# Altium PCB MiniRobot.PcbDoc
Units mm, origin at the board's own origin, x right, y up, seen from the top; angles counter-clockwise.
Board outline 90 x 85 mm, 2 copper layers (Top Layer, Bottom Layer); 52 components, 47 nets, 193 pads, 58 vias.
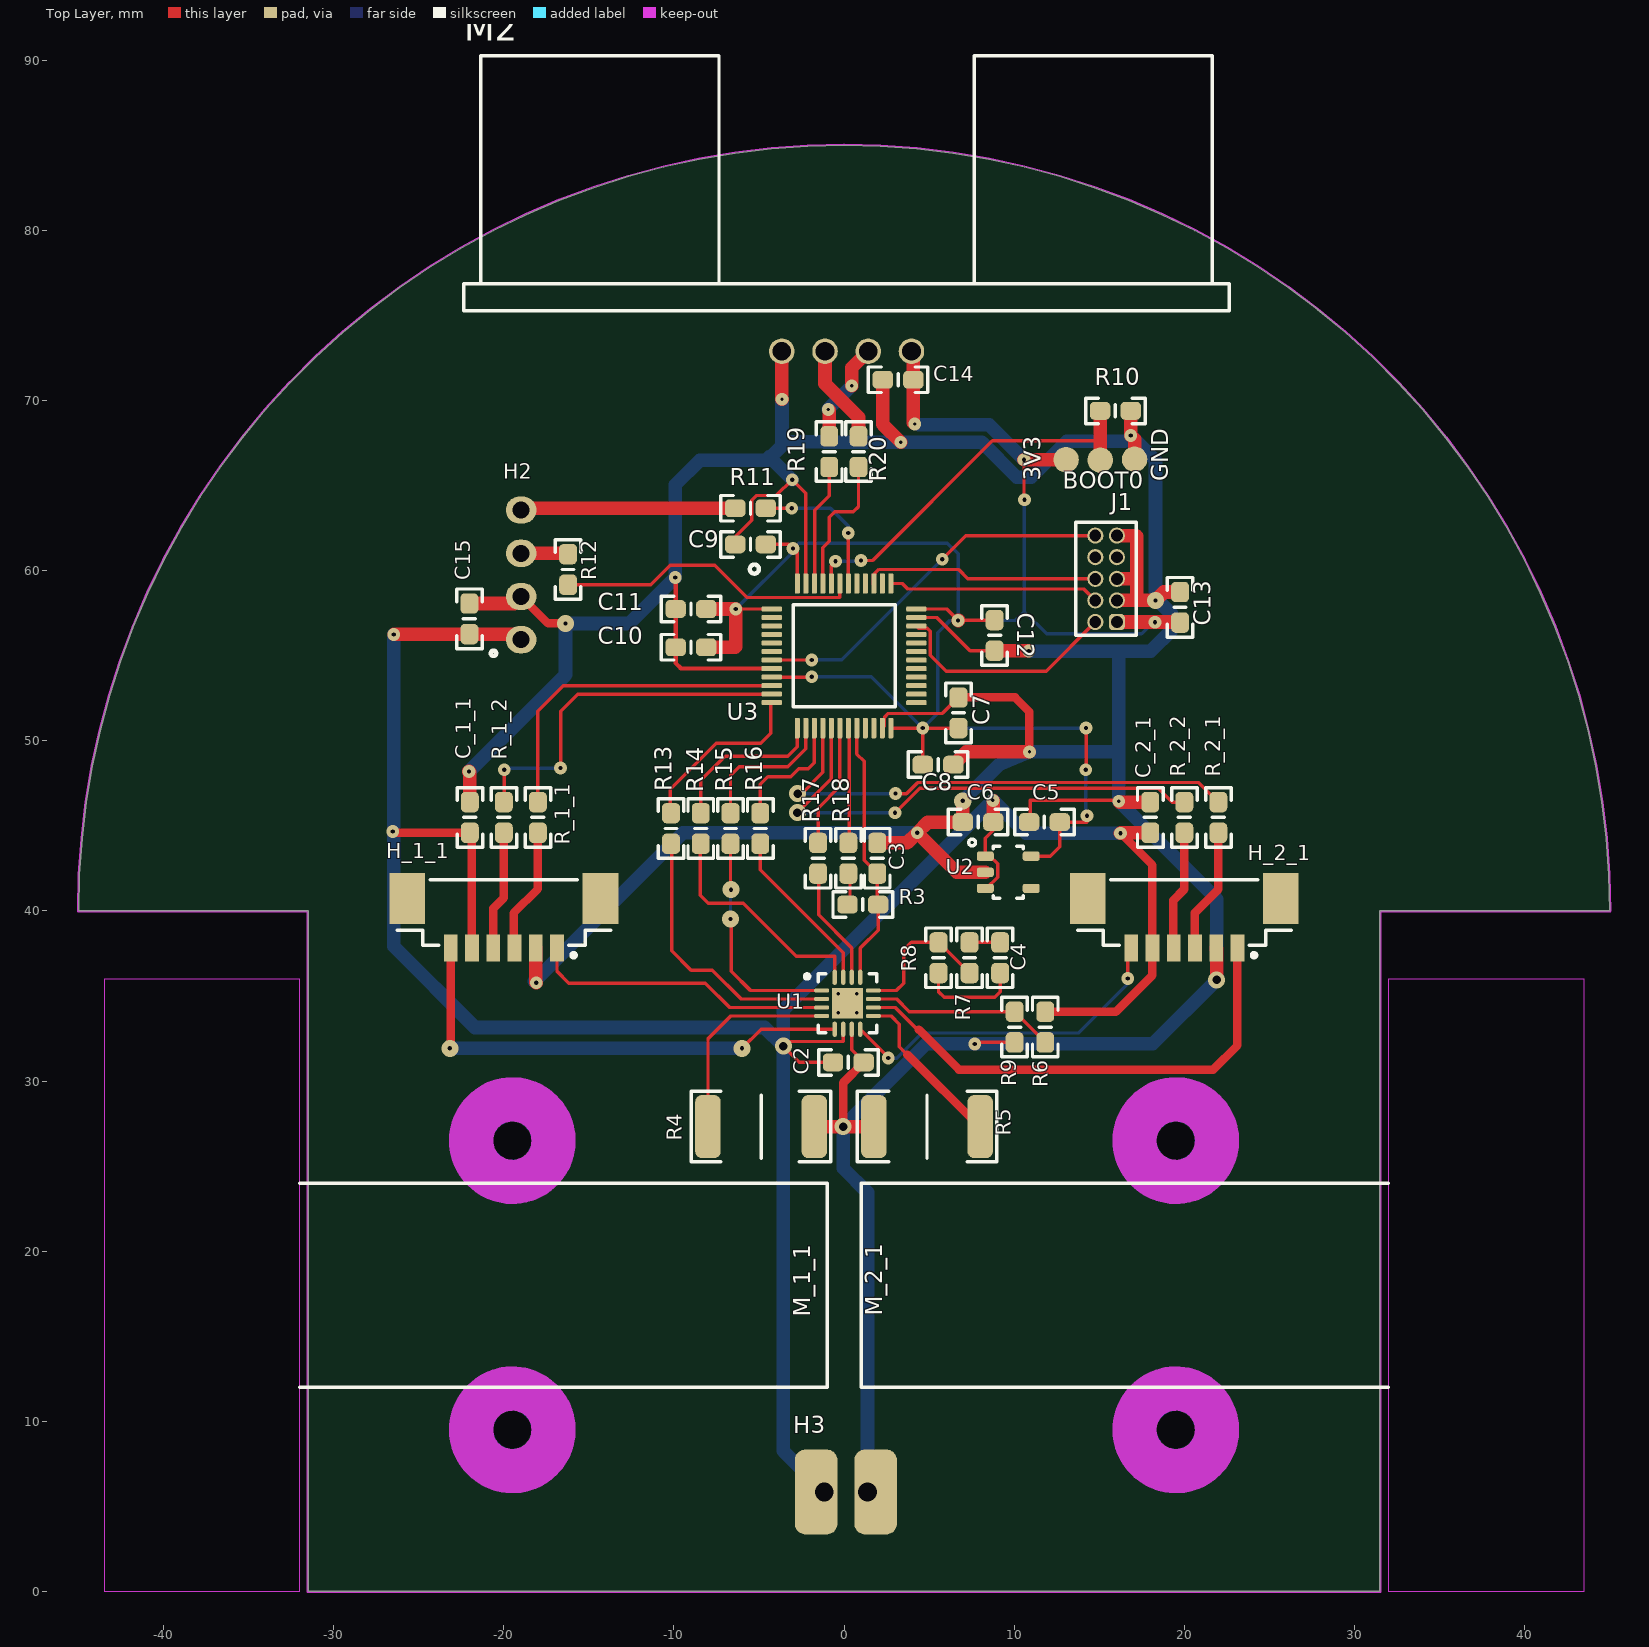
[diagram p0: Top Layer view]
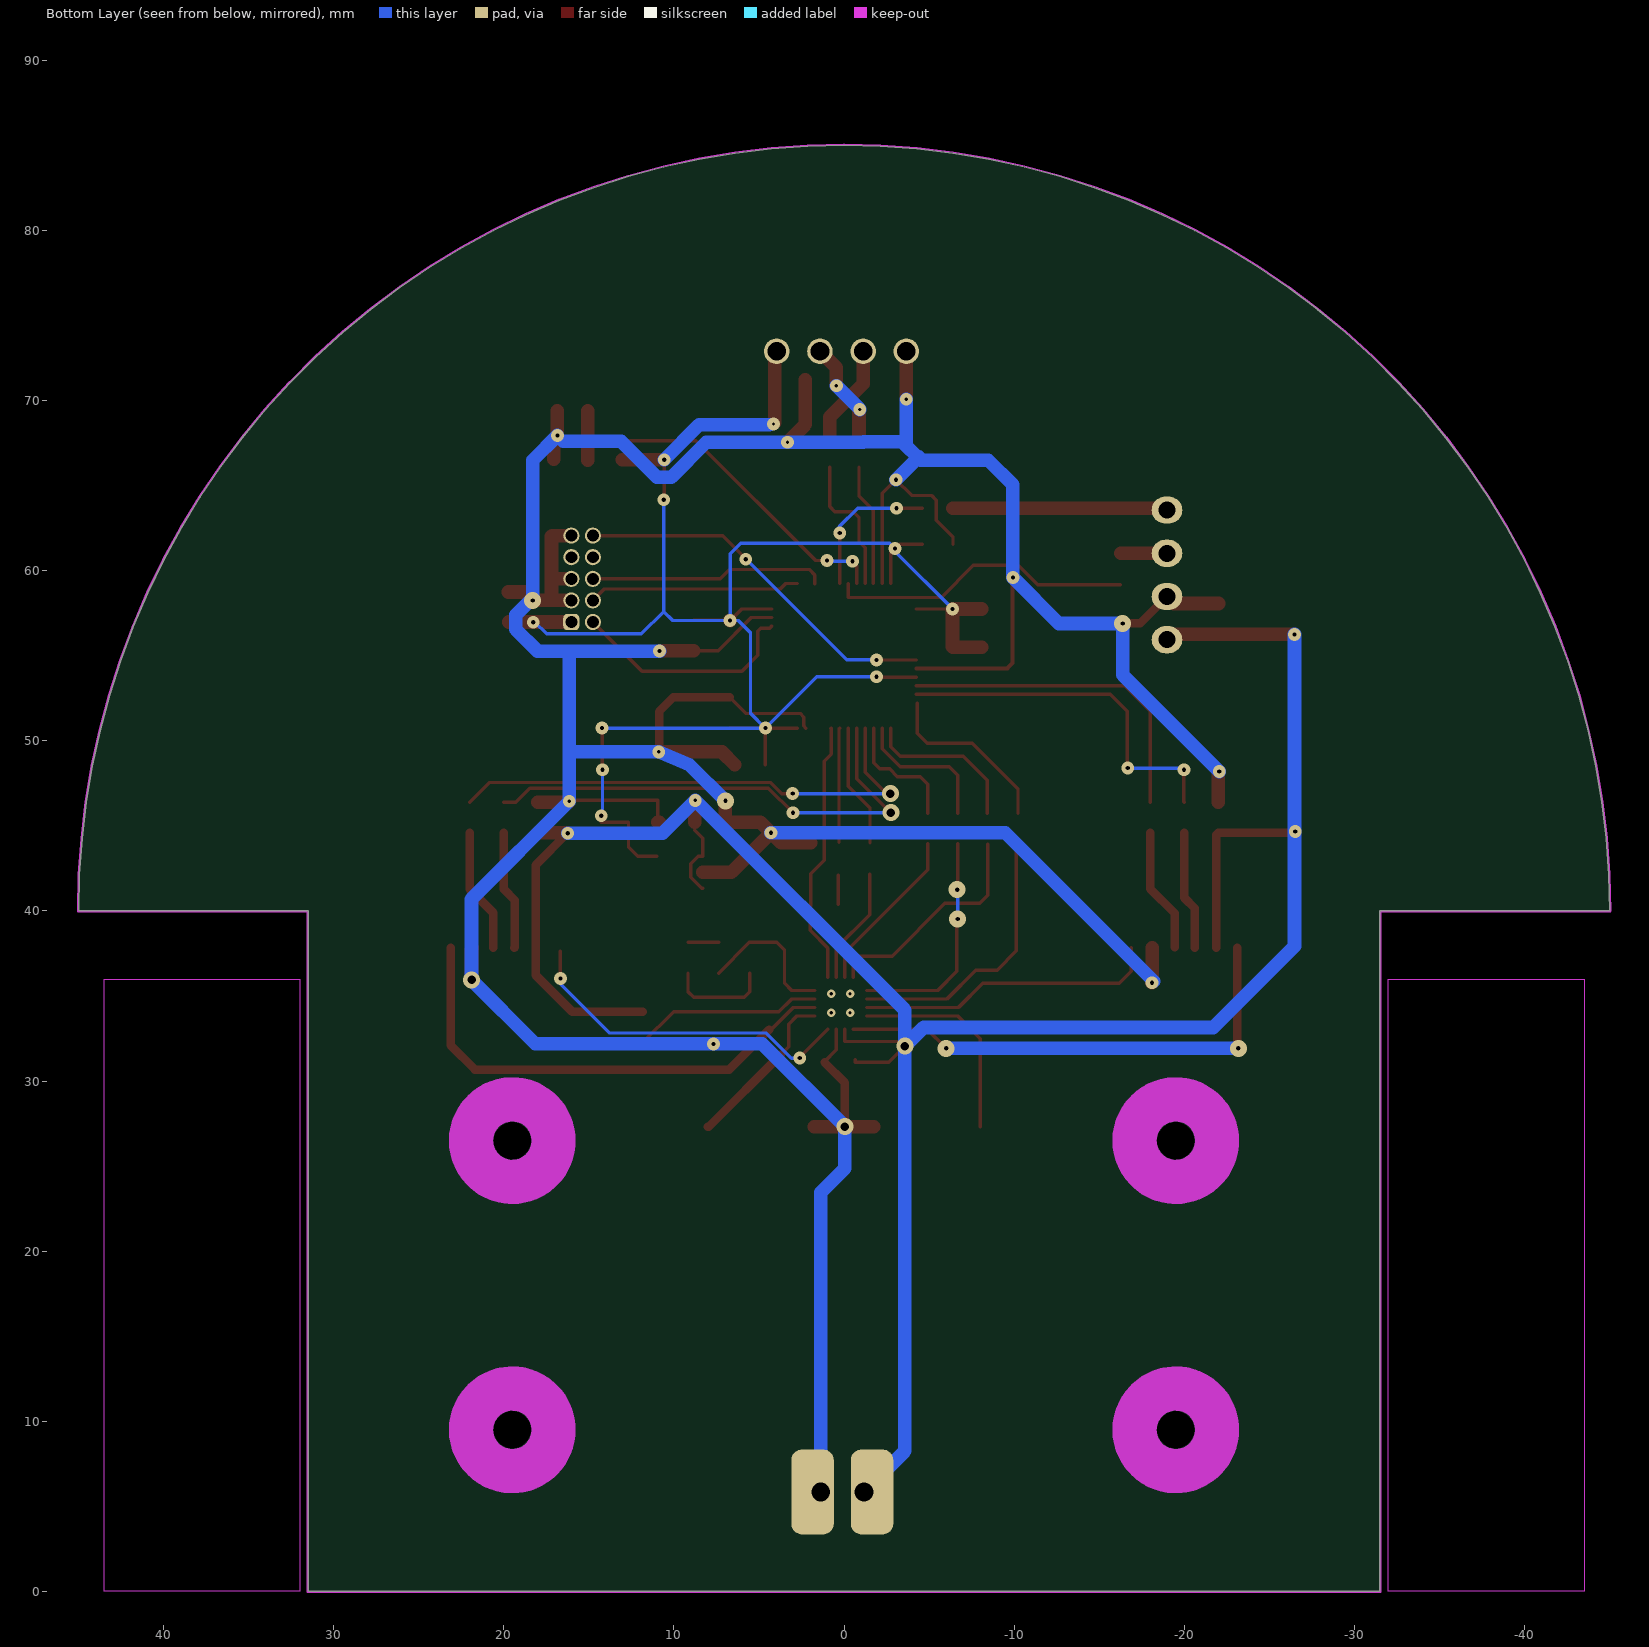
[diagram p1: Bottom Layer view, seen from below]

## Layer stack, top to bottom
Top Solder: solder mask 0.0102, Solder Resist, Dk 3.5
Top Layer: signal copper 0.0356
Dielectric 1: dielectric 0.32, FR-4, Dk 4.8
Bottom Layer: signal copper 0.0356
Bottom Solder: solder mask 0.0102, Solder Resist, Dk 3.5

## Board outline
45,40 44.949,42.141 44.796,44.278 44.542,46.404 44.187,48.516 43.732,50.609 43.177,52.678 42.525,54.718 41.777,56.725 40.933,58.694 39.998,60.62 38.971,62.5 37.856,64.329 36.656,66.103 35.372,67.817 34.009,69.469 32.568,71.054 31.054,72.568 29.469,74.009 27.817,75.372 26.103,76.656 24.329,77.856 22.5,78.971 20.62,79.998 18.694,80.933 16.725,81.777 14.718,82.525 12.678,83.177 10.609,83.732 8.516,84.187 6.404,84.542 4.278,84.796 2.141,84.949 0,85 -2.141,84.949 -4.278,84.796 -6.404,84.542 -8.516,84.187 -10.609,83.732 -12.678,83.177 -14.718,82.525 -16.725,81.777 -18.694,80.933 -20.62,79.998 -22.5,78.971 -24.329,77.856 -26.103,76.656 -27.817,75.372 -29.469,74.009 -31.054,72.568 -32.568,71.054 -34.009,69.469 -35.372,67.817 -36.656,66.103 -37.856,64.329 -38.971,62.5 -39.998,60.62 -40.933,58.694 -41.777,56.725 -42.525,54.718 -43.177,52.678 -43.732,50.609 -44.187,48.516 -44.542,46.404 -44.796,44.278 -44.949,42.141 -45,40 -31.5,40 -31.5,0 31.5,0 31.5,40

## Design rules (kind name [scope] priority, off if disabled: settings)
Clearance [All] p1: gap=0.125
ComponentClearance [All] p1 off: gap=0.254 collisioncheckmode=3 verticalgap=0.254 showdistances=FALSE
HoleSize [All] p1: absolutevalues=TRUE maxlimit=10 minlimit=0.19 maxpercent=80.000 minpercent=20.000
MinimumAnnularRing [All] p1: minimumring=0.076
MinimumSolderMaskSliver [All] p1: minsoldermaskwidth=0.154
PolygonConnect [All] p1: connectstyle=Relief reliefconductorwidth=0.254 reliefentries=4 polygonreliefangle="45 Angle" airgapwidth=0.254
RoomDefinition U_MR_Motor_Control [InComponentClass('U_MR_Motor_Control')] p1: confinementstyle=ConfineIn formatcopy=TRUE lockcomponents=FALSE outline -299.925,-25.175 -249.125,-25.175 -249.125,0.225 -299.925,0.225
RoomDefinition LeftMotor [InComponentClass('LeftMotor')] p2: confinementstyle=ConfineIn formatcopy=TRUE lockcomponents=FALSE outline -299.925,-25.175 -249.125,-25.175 -249.125,0.225 -299.925,0.225
RoomDefinition U_MR_UartConnector [InComponentClass('U_MR_UartConnector')] p3: confinementstyle=ConfineIn formatcopy=TRUE lockcomponents=FALSE outline -299.925,-25.175 -249.125,-25.175 -249.125,0.225 -299.925,0.225
RoomDefinition U_MR_RangeSensor [InComponentClass('U_MR_RangeSensor')] p4: confinementstyle=ConfineIn formatcopy=TRUE lockcomponents=FALSE outline -299.925,-25.175 -249.125,-25.175 -249.125,0.225 -299.925,0.225
RoomDefinition U_MR_Power [InComponentClass('U_MR_Power')] p5: confinementstyle=ConfineIn formatcopy=TRUE lockcomponents=FALSE outline -299.925,-25.175 -249.125,-25.175 -249.125,0.225 -299.925,0.225
RoomDefinition U_MR_Mcu [InComponentClass('U_MR_Mcu')] p6: confinementstyle=ConfineIn formatcopy=TRUE lockcomponents=FALSE outline -299.925,-25.175 -249.125,-25.175 -249.125,0.225 -299.925,0.225
RoomDefinition RightMotor [InComponentClass('RightMotor')] p7: confinementstyle=ConfineIn formatcopy=TRUE lockcomponents=FALSE outline -299.925,-25.175 -249.125,-25.175 -249.125,0.225 -299.925,0.225
RoutingVias [All] p1: holewidth=0.25 width=0.6 viastyle="Through Hole" minholewidth=0.2 minwidth=0.45 maxholewidth=1 maxwidth=2
SilkToSilkClearance [All] p1: silktosilkclearance=0.154
SilkToSolderMaskClearance [IsPad] p1: minsilkscreentomaskgap=0 clearancetoexposedcopper=TRUE
SolderMaskExpansion SolderMask_Via [IsVia] p1: expansion=-100
SolderMaskExpansion [All] p2: expansion=0.102
Width [All] p1: maxlimit=10 minlimit=0.075 preferedwidth=0.2 minimp=50.000000 maximp=50.000000 favimp=50.000000
24 further rules are at their usual default settings.

## Classes and differential pairs
component class U_MR_UartConnector: C15 H2 R20
component class U_MR_RangeSensor: C14 M2 R20
component class U_MR_Motor_Control: C2 C3 C4 R3 R4 R5 R6 R7 R8 R9 U1
component class U_MR_Mcu: 3V3 BOOT0 C7 C8 C9 C10 C11 C12 C13 GND J1 R10 R11 R13 R14 R15 R16 R17 R18 R19 U3
component class LeftMotor: C_1_1 H_1_1 M_1_1 R_1_1 R_1_2
component class RightMotor: C_2_1 H_2_1 M_2_1 R_2_1 R_2_2
component class U_MR_Power: C5 C6 H3 U2
channel class MR_Motor: LeftMotor RightMotor

## Components (designator, comment, footprint, x,y, rotation, side; value= is the part's Value field where it differs from the comment)
3V3 "TestPoint" ROUND_TEST_POINT 13.05,66.525 r180 top
BOOT0 "TestPoint" ROUND_TEST_POINT 15.063,66.5 r270 top
C2 "CerCap" 0603_CAP_LD 0.25,31.1 r180 top
C3 "CerCap" 0603_CAP_LD 1.95,43.1 r270 top
C4 "CerCap" 0603_CAP_LD 9.175,37.25 r90 top
C5 "CerCap" 0603_CAP_LD 11.775,45.225 r0 top
C6 "CerCap" 0603_CAP_LD 7.875,45.225 r0 top
C7 "CerCap" 0603_CAP_LD 6.725,51.65 r270 top
C8 "CerCap" 0603_CAP_LD 5.525,48.6 r180 top
C9 "CerCap" 0603_CAP_LD -5.5,61.55 r0 top
C10 "CerCap" 0603_CAP_LD -9,55.5 r0 top
C11 "CerCap" 0603_CAP_LD -9,57.75 r0 top
C12 "CerCap" 0603_CAP_LD 8.85,56.2 r90 top
C13 "CerCap" 0603_CAP_LD 19.75,57.85 r270 top
C14 "CerCap" 0603_CAP_LD 3.175,71.225 r0 top
C15 "CerCap" 0603_CAP_LD -22.025,57.175 r270 top
C_1_1 "CerCap" 0603_CAP_LD -22,45.5 r270 top (schematic designator C1)
C_2_1 "CerCap" 0603_CAP_LD 18,45.5 r270 top (schematic designator C1)
GND "TestPoint" ROUND_TEST_POINT 17.075,66.55 r90 top
H2 "Header" "HE14 1x4 Straight" -18.983,59.755 r90 top
H3 "CustomBatteryConnector" CUSTOMBATTERYCONNECTOR 0.105,5.85 r0 top
H_1_1 "Header" HEADER_1X6_PICOBLADE_653106124022 -20,39.9 r180 top (schematic designator H1)
H_2_1 "Header" HEADER_1X6_PICOBLADE_653106124022 20,39.9 r180 top (schematic designator H1)
J1 "Debug" 62201021121 15.4,59.525 r90 top
M2 "Ultrasonic Range Sensor" HC-SR04 0.15,72.9 r0 top
M_1_1 "MotorGroup" MOTORGROUP -1,18 r0 top locked (schematic designator M1)
M_2_1 "MotorGroup" MOTORGROUP 1,18 r180 top locked (schematic designator M1)
R3 "Resistor" 0603_RES_LD 1.1,40.375 r180 top
R4 "Resistor" 2512_RES_LD -4.875,27.325 r0 top
R5 "Resistor" 2512_RES_LD 4.875,27.325 r180 top
R6 "Resistor" 0603_RES_LD 11.825,33.175 r90 top
R7 "Resistor" 0603_RES_LD 7.375,37.25 r270 top
R8 "Resistor" 0603_RES_LD 5.55,37.25 r90 top
R9 "Resistor" 0603_RES_LD 10.025,33.175 r90 top
R10 "Resistor" 0603_RES_LD 15.95,69.4 r180 top
R11 "Resistor" 0603_RES_LD -5.5,63.675 r0 top
R12 "Resistor" 0603_RES_LD -16.225,60.075 r90 top
R13 "Resistor" 0603_RES_LD -10.175,44.85 r90 top
R14 "Resistor" 0603_RES_LD -8.425,44.85 r90 top
R15 "Resistor" 0603_RES_LD -6.675,44.85 r90 top
R16 "Resistor" 0603_RES_LD -4.925,44.85 r90 top
R17 "Resistor" 0603_RES_LD -1.525,43.1 r90 top
R18 "Resistor" 0603_RES_LD 0.25,43.1 r90 top
R19 "Resistor" 0603_RES_LD -0.875,67 r270 top
R20 "Resistor" 0603_RES_LD 0.85,67 r90 top
R_1_1 "Resistor" 0603_RES_LD -18,45.5 r270 top (schematic designator R1)
R_1_2 "Resistor" 0603_RES_LD -20,45.5 r270 top (schematic designator R2)
R_2_1 "Resistor" 0603_RES_LD 22,45.5 r270 top (schematic designator R1)
R_2_2 "Resistor" 0603_RES_LD 20,45.5 r270 top (schematic designator R2)
U1 "Dual Brush Motor Driver" QFN-STSPIN240 0.2,34.575 r0 top
U2 "Low noise, Low Iq LDO" LP5907 9.65,42.275 r0 top
U3 "Microcontroller" STM32_LQFP48 0,55 r0 top

## Footprints (in the part's own frame and the unit in brackets; to place one, negate y for a bottom-side part, rotate by r counter-clockwise, add the part's x,y. Pads: shape width x height; smd on the part's side, far side on the other; paste and mask are expansions set on the pad)
0603_CAP_LD [mm] "0603 Capacitor Low Density"
  rrect50% 1.2x1.05 smd: 1(-0.9,0) 2(0.9,0)
  silkscreen extent -1.75,-0.75 1.75,0.75
0603_RES_LD [mm] "0603 Resistor Low Density"
  rrect50% 1.2x1.05 smd: 1(-0.9,0) 2(0.9,0)
  silkscreen extent -1.75,-0.75 1.75,0.75
2512_RES_LD [mm] "2512 Low Density Resistor"
  rrect50% 1.5x3.7 smd: 1(-3.125,0) 2(3.125,0)
  silkscreen extent -4.1,-2.07 4.1,2.07
62201021121 [mm] "Pin Header, pitch 1.27 mm, THT, Vertical, dual row, 10p"
  rrect50% 0.95x0.95 hole 0.7: 1(-2.54,-0.635)
  round 0.95 hole 0.7: 2(-2.54,0.635) 3(-1.27,-0.635) 4(-1.27,0.635) 5(0,-0.635) 6(0,0.635) 7(1.27,-0.635) 8(1.27,0.635) 9(2.54,-0.635) 10(2.54,0.635)
  silkscreen extent -3.32,-1.78 3.32,1.78, body extent -3.17,-1.7 3.18,1.7, height 5.33
CUSTOMBATTERYCONNECTOR [mm] "CustomBatteryConnector"
  rrect50% 2.5x5 smd paste-100: +(-1.75,0) -(1.75,0)
  rrect50% 2.5x5 smd far side paste-100: +(-1.75,0) -(1.75,0)
  round 1.5 hole 1.1 unplated paste-100: +(-1.27,0) -(1.27,0)
HC-SR04 [mm] "HC-SR04"
  round 1.5 hole 1.1 unplated: 1(-3.81,0) 2(-1.27,0) 3(1.27,0) 4(3.81,0)
  silkscreen extent -22.5,2.38 22.5,17.38, body extent -22.72,-0.3 22.72,17.49, height 20
"HE14 1x4 Straight" [mm] "Connector HE14 Straight 1x4"
  oval 1.6x1.8 hole 1 mask+0.102: 1(-3.81,0) 2(-1.27,0) 3(1.27,0) 4(3.81,0)
  silkscreen extent -4.77,1.47 -4.45,1.78, body extent -5.08,-1.27 5.08,1.27, height 9.5
HEADER_1X6_PICOBLADE_653106124022 [mm] "1.25mm SMT Male Vertical Shrouded Header, 6p"
  rect 0.81x1.6 smd: 1(-3.125,2.07) 2(-1.875,2.07) 3(-0.625,2.07) 4(0.625,2.07) 5(1.875,2.07) 6(3.125,2.07)
  rect 2.1x3 smd: ""(-5.675,-0.83) ""(5.675,-0.83)
  silkscreen extent -6.27,-1.92 6.27,2.62
LP5907 [mm] "LP5907 SOT23"
  rrect50% 1x0.55 smd mask+0.102: 1(-1.35,0.95) 2(-1.35,0) 3(-1.35,-0.95) 4(1.35,-0.95) 5(1.35,0.95)
  silkscreen extent -2.33,-1.52 0.88,1.95
MOTORGROUP [mm]
  round 0 hole 2.2 unplated paste+0 mask+0: 21(-18.5,8.5) 22(-18.5,-8.5)
  Keep-Out Layer pour cut-out: -31,-18 -31,18 -42.5,18 -42.5,-18
  Keep-Out Layer circle w2.6: c-18.5,8.5 r2.425
  Keep-Out Layer circle w2.6: c-18.5,-8.5 r2.425
  silkscreen extent -31,-6 0,6
QFN-STSPIN240 [mm] "QFN, 16-Leads, Body 3,00x3,00mm, Pitch 0,50mm, Thermal Pad 1,80x1,80mm, IPC Low Density"
  oval 0.9x0.25 smd: 1(-1.525,0.75) 2(-1.525,0.25) 3(-1.525,-0.25) 4(-1.525,-0.75) 9(1.525,-0.75) 10(1.525,-0.25) 11(1.525,0.25) 12(1.525,0.75)
  oval 0.25x0.9 smd: 5(-0.75,-1.525) 6(-0.25,-1.525) 7(0.25,-1.525) 8(0.75,-1.525) 13(0.75,1.525) 14(0.25,1.525) 15(-0.25,1.525) 16(-0.75,1.525)
  rect 1.8x1.8 smd: 17(0,0)
  silkscreen extent -2.5,-1.73 1.73,1.73
ROUND_TEST_POINT [mm] "Small round test point"
  round 1.5 smd paste-100: 1(0,0)
STM32_LQFP48 [mm]
  rrect50% 1.2x0.3 smd: 1(-4.25,2.75) 2(-4.25,2.25) 3(-4.25,1.75) 4(-4.25,1.25) 5(-4.25,0.75) 6(-4.25,0.25) 7(-4.25,-0.25) 8(-4.25,-0.75) 9(-4.25,-1.25) 10(-4.25,-1.75) 11(-4.25,-2.25) 12(-4.25,-2.75) 25(4.25,-2.75) 26(4.25,-2.25) 27(4.25,-1.75) 28(4.25,-1.25) 29(4.25,-0.75) 30(4.25,-0.25) 31(4.25,0.25) 32(4.25,0.75) 33(4.25,1.25) 34(4.25,1.75) 35(4.25,2.25) 36(4.25,2.75)
  rrect50% 0.3x1.2 smd: 13(-2.75,-4.25) 14(-2.25,-4.25) 15(-1.75,-4.25) 16(-1.25,-4.25) 17(-0.75,-4.25) 18(-0.25,-4.25) 19(0.25,-4.25) 20(0.75,-4.25) 21(1.25,-4.25) 22(1.75,-4.25) 23(2.25,-4.25) 24(2.75,-4.25) 37(2.75,4.25) 38(2.25,4.25) 39(1.75,4.25) 40(1.25,4.25) 41(0.75,4.25) 42(0.25,4.25) 43(-0.25,4.25) 44(-0.75,4.25) 45(-1.25,4.25) 46(-1.75,4.25) 47(-2.25,4.25) 48(-2.75,4.25)
  silkscreen extent -5.54,-3 3,5.37

## Part data
C2 C3 C4 C5 C6 C7 C8 C9 C10 C11 C12 C13 C14 C15 C_1_1 C_2_1: "Ceramic Capacitor"
H2: library part Header_4x1, "Header 4x1 PIns"
H3: library part BatteryConnector, "Custom Battery Connector"
H_1_1 H_2_1: library part Header_6x1, "Header 6x1 Pins"
J1: library part Cortex_10x2, "Cortex 10 pins Debug Connector"
M2: library part HC-SR04
M_1_1 M_2_1: library part Motor
U1: library part STSPIN240, "ST Dual Motor Driver"
U2: library part LP5907, "LP5907 Low Noise Low Iq LDO"
U3: library part STM32F303CBT6, "STM32F303 Microcontroller"

## Via types
v1: diameter 0.75, hole 0.25, Top Layer to Bottom Layer, 34 vias
v2: diameter 0.75, hole 0.2, Top Layer to Bottom Layer, 8 vias
v3: diameter 1, hole 0.25, Top Layer to Bottom Layer, 7 vias
v4: diameter 1, hole 0.5, Top Layer to Bottom Layer, 5 vias
v5: diameter 0.5, hole 0.2, Top Layer to Bottom Layer, 4 vias

## Nets (pads, with @x,y where several pads share a name; then routed paths per layer and width w, separated by ;. In a path a pad name is that pad's centre, name@x,y a point inside that pad or via, vN(x,y) a via of type N, cw(c..) or ccw(c..) an arc to the next point about the centre after c; other vN are vias at no path point)
3V3: 3V3.1 C5.2 C7.2 C8.2 C9.2 C10.2 C11.2 C12.2 C13.2 C14.2 J1.1 M2.4 U2.5 U3.1 U3.9 U3.24 U3.36 U3.48 | length 118.2
  Top Layer w0.2: -6.4,55.5 -6.375,55.525 ; v1(-6.375,57.75) U3.1 ; C9.2 -3.25,61.55 v1(-3,61.3) -2.75,61.05 U3.48 ; U3.9 -1.925,53.75 v1(-1.9,53.775) ; U3.24 v1(4.625,50.75) ; U3.36 6.025,57.75 v1(6.7,57.075) ; C8.2 v1(4.625,50.75) ; C7.2 v1(4.625,50.75) ; v1@6.725,57.1 C12.2 ; v1(10.575,66.525) 10.575,64.192 v1(10.6,64.167) ; U2.5 12.125,43.225 12.675,43.775 C5.2 14.275,45.225 v1(14.275,45.6) ; v1(14.201,48.302) 14.225,48.327 v1(14.225,50.75)
  Top Layer w0.8: C10.2 -6.4,55.5 ; C11.2 v1(-6.375,57.75) -6.375,55.525 ; v2@4.075,68.7 C14.2 M2.4@4.075,72.785 ; v1(6.7,57.075) v1@6.725,57.1 ; v1(10.575,66.525) 3V3.1 ; J1.1 C13.2@19.715,56.985
  Bottom Layer w0.2: v1(-6.375,57.75) -3,61.125 v1(-3,61.3) -2.675,61.625 6.075,61.625 6.7,61 v1(6.7,57.075) ; v1(-1.9,53.775) 1.6,53.775 v1(4.625,50.75) ; v1(10.6,64.167) 10.6,57.6 ; v1(14.201,48.302) 14.201,45.674 v1(14.275,45.6) ; v1(14.225,50.75) v1(4.625,50.75) ; v1(18.275,56.975) 18.175,56.975 17.485,56.285 11.915,56.285 10.6,57.6 ; v1(4.625,50.75) 5.5,51.625 5.5,56.35 6.225,57.075 v1(6.7,57.075) ; v1(6.7,57.075) 10.075,57.075 10.6,57.6
  Bottom Layer w0.8: v2@4.4,68.575 8.525,68.575 v1(10.575,66.525)
  other v2: 4.15,68.625
BOOT0: BOOT0.1 R10.2 U3.44 | length 22.7
  Top Layer w0.2: U3.44 -0.75,60.303 v1(-0.5,60.553) ; v1(1,60.6) 1.672,60.6 8.722,67.65 15.05,67.65
  Top Layer w0.8: BOOT0.1 R10.2@15.063,69.388
  Bottom Layer w0.2: v1(-0.5,60.553) v1@0.953,60.553
GND: C2.1 C3.1 C5.1 C6.1 C7.1 C8.1 C9.1 C10.1 C11.1 C12.1 C13.1 C14.1 C15.1 C_1_1.1 C_2_1.1 GND.1 H2.2 H3.- H_1_1.2 H_2_1.2 J1.3 J1.5 J1.9 M2.1 R4.2 R5.2 R9.1 R10.1 U1.7 U2.2 U3.8 U3.23 U3.35 U3.47 | length 297.4
  Top Layer w0.2: H2.2@-19.393,58.075 H2.2 ; C9.1 -6.4,62 -5.425,62.975 -5.425,64.139 -5.139,64.425 -3.975,64.425 v1(-3.05,65.35) -2.25,64.55 U3.47 ; U1.7 0.45,31.85 C2.1@1.15,31.15 ; U3.23 2.375,50.875 2.375,51.399 2.586,51.61 5.785,51.61 C7.1 ; U3.35 5.45,57.25 7.4,55.3 C12.1 ; v1@7.675,32.275 R9.1 ; v1@10.825,55.3 v1(10.85,55.275) ; C5.1 10.95,45.3 10.95,46.5 v2@16.1,46.5
  Top Layer w0.25: v1@-9.9,59.575 C11.1 C10.1 -9.9,54.575 -9.6,54.275 -9.6,54.25 U3.8
  Top Layer w0.5: H2.2 -17.398,56.9 v3(-16.375,56.9) ; v4(-0.05,27.325) -0.05,29.9 C2.1 ; C7.1 10.05,52.55 10.875,51.725 v2@10.875,49.35
  Top Layer w0.8: v1(-22.05,48.2) -22,48.15 C_1_1.1 ; C15.1 H2.2@-19.393,58.075 ; H_1_1.2 -18.125,35.8 v1(-18.1,35.775) ; M2.1 -3.66,70.085 v2(-3.65,70.075) ; R4.2 v4(-0.05,27.325) R5.2 ; H3.-@1.375,5.85 H3.-@1.855,5.85 ; C3.1 3.7,44 v1(4.3,44.6) ; C14.1 2.275,68.6 v2(3.325,67.55) ; C8.1 7.175,49.35 v2@10.875,49.35 ; v3(6.975,46.475) C6.1 4.925,45.225 v1(4.3,44.6) ; U2.2 6.625,42.275 v1(4.3,44.6) ; C12.1 v1@10.825,55.3 ; C5.1 C5.1@10.961,45.225 ; J1.3 17.2,58.255 ; J1.5 17.175,59.525 ; J1.9 17.16,62.065 17.2,62.025 17.2,58.255 ; v2@16.2,46.4 C_2_1.1 ; v1(16.85,67.95) R10.1 ; GND.1 v1@17.075,67.725 ; C13.1 18.8,58.75 v3(18.305,58.255) 17.2,58.255 ; H_2_1.2 21.875,37.775 21.9,37.75 v4(21.9,35.95)
  Bottom Layer w0.8: v1(-22.05,48.2) -16.375,53.875 v3(-16.375,56.9) -12.625,56.9 v1(-9.925,59.6) -9.925,65.05 -8.475,66.5 -4.5,66.5 -3.425,67.575 -1.15,67.575 ; v1@-18.2,35.875 -9.475,44.6 v1(4.3,44.6) ; -4.4,66.7 v1(-3.05,65.35) ; -3.65,67.575 v2(-3.65,70.075) ; -1.125,67.55 8.1,67.55 10.15,65.5 11,65.5 13.1,67.6 16.5,67.6 ; H3.-@1.855,5.85 1.375,5.85 1.375,23.45 -0.05,24.875 v4(-0.05,27.325) 4.825,32.2 18.15,32.2 v4(21.9,35.95) 21.9,40.7 v2(16.15,46.45) 16.15,55.275 ; v3(6.975,46.475) 9.1,48.6 v2(10.9,49.35) 16.075,49.35 ; v1(10.85,55.275) 18.025,55.275 19.3,56.55 19.3,57.4 v3@18.445,58.255 ; v1(16.85,67.95) 18.305,66.495 v3(18.305,58.255)
  other v1: 7.675,32.175
NetC3_2: C3.2 R3.1 U1.13 U3.20 | length 15.7
  Top Layer w0.2: U3.20@0.775,50.725 U3.20 0.75,49.225 1.175,48.8 1.175,42.975 C3.2 R3.1@1.95,40.3 ; U1.13 0.95,37.125 0.95,37.825 2,38.875 R3.1
NetC4_1: C4.1 R8.1 | length 6.1
  Top Layer w0.2: R8.1 5.55,35.25 5.875,34.925 8.85,34.925 9.175,35.25 C4.1
NetC4_2: C4.2 R7.1 | length 1.8
  Top Layer w0.2: R7.1 C4.2
NetH2_3: H2.3 R12.2 | length 2.8
  Top Layer w0.2: R12.2@-16.275,61.025 R12.2
  Top Layer w0.8: H2.3 R12.2@-16.275,61.025
NetH2_4: H2.4 R11.1 | length 12.5
  Top Layer w0.8: H2.4@-18.873,63.675 R11.1
NetH_1_1_1: H_1_1.1 U1.3 | length 17.8
  Top Layer w0.2: H_1_1.1 -16.875,36.45 -16.175,35.75 -8.15,35.75 -6.725,34.325 U1.3
NetH_1_1_3: H_1_1.3 R_1_1.2 | length 7.3
  Top Layer w0.5: H_1_1.3@-19.425,37.88 -19.425,39.875 -18,41.3 R_1_1.2
NetH_1_1_4: H_1_1.4 R_1_2.2 | length 7
  Top Layer w0.5: H_1_1.4 -20.625,40.15 -20,40.775 R_1_2.2
NetH_1_1_6: H_1_1.6 U1.5 | length 28.6
  Top Layer w0.2: v3(-6,31.925) -4.875,33.05 U1.5
  Top Layer w0.5: v3@-23.125,31.925 H_1_1.6
  Bottom Layer w0.8: v3@-22.8,31.925 v3(-6,31.925)
  other v3: -23.175,31.925
NetH_2_1_1: H_2_1.1 U1.10 | length 29.2
  Top Layer w0.2: U1.10 3,34.325 4.35,32.975
  Top Layer w0.5: 4.4,33.025 6.75,30.675 21.7,30.675 23.125,32.1 H_2_1.1
NetH_2_1_3: H_2_1.3 R_2_1.2 | length 7.3
  Top Layer w0.5: H_2_1.3 20.625,39.9 22,41.275 R_2_1.2
NetH_2_1_4: H_2_1.4 R_2_2.2 | length 7
  Top Layer w0.5: H_2_1.4 19.35,37.855 19.35,40.625 20,41.275 R_2_2.2
NetH_2_1_6: H_2_1.6 U1.8 | length 20.2
  Top Layer w0.2: U1.8 2.625,31.375 v1(2.602,31.352) ; v1(16.676,36.027) H_2_1.6@16.676,37.631
  Bottom Layer w0.2: v1(2.602,31.352) 3.093,31.352 4.566,32.825 13.775,32.825 16.676,35.726 v1(16.676,36.027)
NetM2_2: M2.2 R20.2 | length 5.8
  Top Layer w0.8: M2.2 -1.12,70.995 0.85,69.025 R20.2
NetM2_3: M2.3 R19.1 | length 6
  Top Layer w0.8: R19.1@-0.9,67.925 R19.1 v2@-0.875,69.425 ; v2(0.45,70.875) 0.45,71.93 M2.3
  Bottom Layer w0.8: v2(-0.925,69.475) -0.925,69.5 v2(0.45,70.875)
NetR3_2: R3.2 R18.1 | length 1.7
  Top Layer w0.2: R3.2@0.35,40.4 R18.1@0.35,42.1
NetR4_1: R4.1 U1.4 | length 12.4
  Top Layer w0.2: R4.1 -8,32.5 -6.675,33.825 U1.4
NetR5_1: R5.1 U1.9 | length 9.7
  Top Layer w0.2: U1.9 2.775,33.825 3.25,33.35 3.25,32.025 3.725,31.55
  Top Layer w0.5: 3.725,31.55 7.95,27.325 R5.1
NetR6_1: R6.1 R9.2 U1.11 | length 11.2
  Top Layer w0.2: U1.11 3.085,34.825 3.835,34.075 R9.2 R6.1
NetR7_2: R7.2 R8.2 U1.12 | length 8.7
  Top Layer w0.2: U1.12 3.075,35.325 3.5,35.75 3.5,37.69 3.96,38.15 R8.2 5.575,38.15 R7.2
NetR11_2: R11.2 U3.42 | length 8.3
  Top Layer w0.2: R11.2 v1(-3.075,63.675) ; U3.42 v1(0.25,62.225)
  Bottom Layer w0.2: v1(-3.075,63.675) -0.8,63.675 0.275,62.6
NetR12_1: R12.1 U3.43 | length 18.1
  Top Layer w0.2: R12.1 -11.375,59.175 -10.225,60.325 -7.6,60.325 -5.7,58.425 -0.25,58.425 U3.43
NetR13_1: R13.1 U1.2 | length 16.3
  Top Layer w0.2: R13.1@-10.2,43.925 R13.1 -10.125,43.9 -10.125,37.65 -9,36.525 -7.75,36.525 -6.05,34.825 U1.2
NetR13_2: R13.2 U3.12 | length 10.4
  Top Layer w0.2: R13.2@-10.225,45.75 -10.225,47.15 -7.525,49.85 -4.9,49.85 -4.3,50.45 U3.12@-4.3,52.2
NetR14_1: R14.1 U1.16 | length 13.6
  Top Layer w0.2: R14.1@-8.45,43.925 -8.45,40.925 -7.975,40.45 -5.925,40.45 -2.825,37.35 -0.55,37.35 U1.16
NetR14_2: R14.2 U3.13 | length 9.5
  Top Layer w0.2: R14.2 -8.425,47.675 -7,49.1 -3.3,49.1 -2.75,49.65 U3.13
NetR15_1: R15.1 U1.1 | length 13.3
  Top Layer w0.2: R15.1 -6.675,41.275 v3(-6.65,41.25) ; v3@-6.625,39.525 -6.625,36.45 -5.5,35.325 U1.1
  Bottom Layer w0.2: v3(-6.675,39.525) -6.675,41.275 v3(-6.65,41.25)
NetR15_2: R15.2 U3.14 | length 8.5
  Top Layer w0.2: R15.2 -6.675,47.975 -6.175,48.475 -3.3,48.475 -2.25,49.525 U3.14
NetR16_1: R16.1 U1.15 | length 9.9
  Top Layer w0.2: R16.1 -4.925,42.425 -0.05,37.55 U1.15
NetR16_2: R16.2 U3.15 | length 7.4
  Top Layer w0.2: R16.2 -4.925,47.45 -4.475,47.9 -3.125,47.9 -2.675,48.35 -2.1,48.35 -1.75,48.7 U3.15
NetR17_1: R17.1 U1.14 | length 6.9
  Top Layer w0.2: R17.1@-1.5,42.175 -1.5,39.775 0.45,37.825 U1.14
NetR17_2: R17.2 U3.18 | length 7.3
  Top Layer w0.2: R17.2 -1.525,46.05 -0.25,47.325 U3.18
NetR18_2: R18.2 U3.19 | length 6.7
  Top Layer w0.2: U3.19 0.3,50.7 R18.2@0.3,44.05
NetR19_2: R19.2 U3.46 | length 7.2
  Top Layer w0.2: U3.46@-1.725,59.275 -1.725,63.55 -0.875,64.4 R19.2
NetR20_1: R20.1 U3.45 | length 8.4
  Top Layer w0.2: U3.45 -1.25,61.35 -0.875,61.725 -0.875,63.15 -0.55,63.475 0.55,63.475 0.85,63.775 R20.1
NetR_1_1_1: R_1_1.1 U3.10 | length 19.7
  Top Layer w0.2: R_1_1.1 -18,51.75 -16.5,53.25 U3.10
NetR_1_2_1: R_1_2.1 U3.11 | length 21.4
  Top Layer w0.2: R_1_2.1 -19.975,46.425 v1(-19.975,48.3) ; v1(-16.675,48.4) -16.65,48.425 -16.65,51.75 -15.65,52.75 U3.11
  Bottom Layer w0.2: v1(-19.975,48.3) -19.875,48.4 v1(-16.675,48.4)
NetR_2_1_1: R_2_1.1 U3.16 | length 30.1
  Top Layer w0.2: v4(-2.725,46.902) v4@-2.623,46.902 ; v4@-2.498,46.902 -1.25,48.15 U3.16 ; v1(3.025,46.902) 3.668,46.902 4.315,47.55 20.85,47.55 R_2_1.1
  Bottom Layer w0.2: v4@-2.827,46.8 v4(-2.725,46.902) v1(3.025,46.902)
NetR_2_2_1: R_2_2.1 U3.17 | length 29.5
  Top Layer w0.2: v4(-2.75,45.775) -0.75,47.775 U3.17 ; v1(3,45.775) 4.45,47.225 18.464,47.225 19.289,46.4 R_2_2.1
  Bottom Layer w0.2: v4(-2.75,45.775) v1(3,45.775)
nRST: J1.10 U3.7 | length 22
  Top Layer w0.2: U3.7 -1.928,54.75 -1.9,54.778 v1@-1.75,54.778 ; v1@5.763,60.688 7.14,62.065 J1.10
  Bottom Layer w0.2: v1@-1.75,54.778 -0.147,54.778 v1@5.763,60.688
  other v1: -1.9,54.75 5.775,60.675
SWCLK: J1.4 U3.37 | length 12.4
  Top Layer w0.2: U3.37 3.425,59.25 3.75,58.925 14.095,58.925 J1.4
SWDIO: J1.2 U3.34 | length 13.6
  Top Layer w0.2: U3.34 4.375,56.625 4.899,56.625 5.075,56.449 5.075,55.025 6,54.1 11.88,54.1 J1.2
SWO: J1.6 U3.39 | length 13.9
  Top Layer w0.2: U3.39@1.725,59.225 1.725,59.749 2.051,60.075 6.725,60.075 7.275,59.525 J1.6
VBATT: C2.2 C6.2 C15.2 C_1_1.2 C_2_1.2 H2.1 H3.+ H_1_1.5 H_2_1.5 R6.2 U1.6 U2.1 U2.3 | length 148.8
  Top Layer w0.2: C2.2@-0.65,31.25 C2.2 -2.625,31.1 v4(-3.575,32.05) -3.3,32.325 -0.05,32.325 U1.6 ; U2.3 8.363,41.325 9.025,41.987 9.025,42.769 8.569,43.225 U2.1 8.3,44.275 C6.2@8.775,44.75
  Top Layer w0.5: v1(-26.525,44.675) v1@-26.475,44.625 ; v1@-26.45,44.6 C_1_1.2 -21.875,44.475 H_1_1.5 ; R6.2 15.975,34.075 18.125,36.225 H_2_1.5 18.125,42.7 v1(16.25,44.575)
  Top Layer w0.8: v1@-26.45,56.275 C15.2 H2.1@-19.313,56.275 ; C6.2 v2@8.775,46.475 ; v1(16.25,44.575) 16.275,44.6 C_2_1.2
  Bottom Layer w0.8: v1(-26.475,56.25) -26.475,37.925 -21.7,33.15 -4.675,33.15 v4(-3.575,32.05) ; H3.+@-1.165,5.85 -3.575,8.26 v4(-3.575,32.05) ; v1(16.25,44.575) 10.675,44.575 v2(8.75,46.5) -3.575,34.175 v4(-3.575,32.05)
pads on no net: H_1_1. H_2_1. J1.7 J1.8 M_1_1.21 M_1_1.22 M_2_1.21 M_2_1.22 U1.17 U2.4 U3.2 U3.3 U3.4 U3.5 U3.6 U3.21 U3.22 U3.25 U3.26 U3.27 U3.28 U3.29 U3.30 U3.31 U3.32 U3.33 U3.38 U3.40 U3.41
copper on no net:
  other v5: -0.35,34.025 0.75,34.025 -0.35,35.125 0.75,35.125

## Keep-outs
Keep-Out Layer:
  lines w0.1: 44.999,42.141 ccw(c44.949,42.141) 44.999,42.142 ; -45.05,40.002 ccw(c-45,40) -45,39.95 ; -45.05,40.001 ccw(c-45,40) -45,39.95 ; -45.05,40.001 -45.05,40.002 ; -45.05,40.002 -44.999,42.142 ; -45,39.95 -31.55,39.95 -31.55,0 ; -44.999,42.142 cw(c-44.949,42.141) -44.999,42.145 ; -44.999,42.142 cw(c-44.949,42.141) -44.999,42.145 ; -44.999,42.142 -44.999,42.142 ; -44.999,42.145 -44.846,44.281 ; -44.846,44.281 cw(c-44.796,44.278) -44.846,44.283 ; -44.846,44.281 cw(c-44.796,44.278) -44.846,44.283 ; -44.846,44.283 -44.592,46.41 ; -44.592,46.41 cw(c-44.542,46.404) -44.591,46.412 ; -44.592,46.41 cw(c-44.542,46.404) -44.591,46.413 ; -44.591,46.412 -44.591,46.413 ; -44.591,46.413 -44.236,48.524 ; -44.236,48.524 cw(c-44.187,48.516) -44.236,48.527 ; -44.236,48.525 cw(c-44.187,48.516) -44.236,48.527 ; -44.236,48.524 -44.236,48.525 ; -44.236,48.527 ccw(c-44.187,48.516) -44.236,48.527 ; -44.236,48.527 -44.236,48.527 ; -44.236,48.527 -44.236,48.527 ; -44.236,48.527 -43.78,50.62 ; -43.78,50.62 cw(c-43.732,50.609) -43.78,50.622 ; -43.78,50.62 ccw(c-43.732,50.609) -43.78,50.62 ; -43.78,50.62 cw(c-43.732,50.609) -43.78,50.622 ; -43.78,50.62 -43.78,50.62 ; -43.78,50.62 -43.78,50.62 ; -43.78,50.622 ccw(c-43.732,50.609) -43.78,50.622 ; -43.78,50.622 -43.78,50.622 ; -43.78,50.622 -43.78,50.622 ; -43.78,50.622 -43.226,52.691 ; -43.226,52.691 cw(c-43.177,52.678) -43.225,52.693 ; -43.226,52.691 ccw(c-43.177,52.678) -43.226,52.691 ; -43.226,52.691 cw(c-43.177,52.678) -43.225,52.693 ; -43.226,52.691 -43.226,52.691 ; -43.226,52.691 -43.226,52.691 ; -43.225,52.693 -42.573,54.733 ; -42.573,54.733 cw(c-42.525,54.718) -42.572,54.736 ; -42.573,54.733 cw(c-42.525,54.718) -42.572,54.735 ; -42.572,54.736 ccw(c-42.525,54.718) -42.572,54.735 ; -42.572,54.735 -42.572,54.736 ; -42.572,54.736 -42.572,54.736 ; -42.572,54.736 -41.824,56.742 ; -41.823,56.742 cw(c-41.777,56.725) -41.823,56.744 ; -41.823,56.742 ccw(c-41.777,56.725) -41.823,56.742 ; -41.823,56.742 cw(c-41.777,56.725) -41.823,56.744 ; -41.824,56.742 -41.823,56.742 ; -41.823,56.742 -41.823,56.742 ; -41.823,56.744 -40.979,58.713 ; -40.979,58.713 cw(c-40.933,58.694) -40.978,58.716 ; -40.979,58.713 cw(c-40.933,58.694) -40.979,58.715 ; -40.979,58.715 cw(c-40.933,58.694) -40.978,58.716 ; -40.979,58.715 -40.978,58.716 ; -40.978,58.716 -40.978,58.716 ; -40.978,58.716 -40.043,60.642 ; -40.043,60.642 cw(c-39.998,60.62) -40.043,60.642 ; -40.043,60.642 cw(c-39.998,60.62) -40.042,60.644 ; -40.043,60.642 -40.043,60.642 ; -40.043,60.642 -40.043,60.642 ; -40.043,60.642 cw(c-39.998,60.62) -40.042,60.644 ; -40.042,60.644 -39.015,62.524 ; -39.015,62.524 cw(c-38.971,62.5) -39.014,62.526 ; -39.015,62.524 cw(c-38.971,62.5) -39.014,62.526 ; -39.014,62.526 -37.899,64.355 ; -37.899,64.355 cw(c-37.856,64.329) -37.898,64.357 ; -37.899,64.355 cw(c-37.856,64.329) -37.898,64.357 ; -37.898,64.357 -37.898,64.357 ; -37.898,64.357 -36.698,66.13 ; -36.698,66.13 cw(c-36.656,66.103) -36.696,66.133 ; -36.697,66.131 cw(c-36.656,66.103) -36.696,66.133 ; -36.698,66.13 -36.697,66.131 ; -36.696,66.133 -35.412,67.847 ; -35.412,67.847 cw(c-35.372,67.817) -35.411,67.849 ; -35.412,67.847 cw(c-35.372,67.817) -35.411,67.849 ; -35.411,67.849 -34.047,69.501 ; -34.047,69.501 cw(c-34.009,69.469) -34.046,69.502 ; -34.047,69.501 cw(c-34.009,69.469) -34.046,69.502 ; -34.046,69.503 ccw(c-34.009,69.469) -34.046,69.502 ; -34.046,69.502 -34.046,69.502 ; -34.046,69.502 -34.046,69.503 ; -34.046,69.503 -32.605,71.087 ; -32.605,71.087 cw(c-32.568,71.054) -32.603,71.089 ; -32.605,71.087 ccw(c-32.568,71.054) -32.605,71.087 ; -32.605,71.087 cw(c-32.568,71.054) -32.603,71.089 ; -32.605,71.087 -32.605,71.087 ; -32.605,71.087 -32.605,71.087 ; -32.603,71.089 -31.089,72.603 ; -31.55,0 ccw(c-31.5,0) -31.5,-0.05 ; -31.55,0 ccw(c-31.5,0) -31.5,-0.05 ; -31.5,-0.05 31.5,-0.05 ; -31.089,72.603 cw(c-31.054,72.568) -31.087,72.605 ; -31.089,72.603 cw(c-31.054,72.568) -31.087,72.605 ; -31.087,72.605 ccw(c-31.054,72.568) -31.087,72.605 ; -31.087,72.605 -31.087,72.605 ; -31.087,72.605 -31.087,72.605 ; -31.087,72.605 -29.503,74.046 ; -29.503,74.046 cw(c-29.469,74.009) -29.502,74.046 ; -29.503,74.046 -29.502,74.046 ; -29.502,74.046 cw(c-29.469,74.009) -29.501,74.047 ; -29.502,74.046 cw(c-29.469,74.009) -29.501,74.047 ; -29.502,74.046 -29.502,74.046 ; -29.501,74.047 -27.849,75.411 ; -27.849,75.411 cw(c-27.817,75.372) -27.847,75.412 ; -27.849,75.411 cw(c-27.817,75.372) -27.847,75.412 ; -27.847,75.412 -26.133,76.696 ; -26.133,76.696 cw(c-26.103,76.656) -26.131,76.697 -26.13,76.698 ; -26.133,76.696 cw(c-26.103,76.656) -26.13,76.698 ; -26.13,76.698 -24.357,77.898 ; -24.357,77.898 cw(c-24.329,77.856) -24.355,77.899 ; -24.357,77.898 cw(c-24.329,77.856) -24.355,77.899 ; -24.357,77.898 -24.357,77.898 ; -24.355,77.899 -22.526,79.014 ; -22.526,79.014 cw(c-22.5,78.971) -22.524,79.015 ; -22.526,79.014 cw(c-22.5,78.971) -22.524,79.015 ; -22.524,79.015 -20.644,80.041 ; -20.644,80.041 cw(c-20.62,79.998) -20.642,80.043 ; -20.644,80.041 cw(c-20.62,79.998) -20.642,80.042 ; -20.642,80.042 cw(c-20.62,79.998) -20.642,80.043 ; -20.642,80.042 -20.642,80.043 ; -20.642,80.043 -20.642,80.043 ; -20.642,80.043 -18.716,80.978 ; -18.715,80.979 cw(c-18.694,80.933) -18.713,80.979 ; -18.715,80.979 ccw(c-18.694,80.933) -18.716,80.978 ; -18.716,80.978 cw(c-18.694,80.933) -18.713,80.979 ; -18.716,80.978 -18.716,80.978 ; -18.716,80.978 -18.715,80.979 ; -18.713,80.979 -16.745,81.823 ; -16.745,81.823 cw(c-16.725,81.777) -16.742,81.823 ; -16.745,81.823 cw(c-16.725,81.777) -16.742,81.823 ; -16.742,81.823 cw(c-16.725,81.777) -16.742,81.823 ; -16.742,81.823 -16.742,81.823 ; -16.742,81.823 -16.742,81.823 ; -16.742,81.823 -14.736,82.572 ; -14.736,82.572 cw(c-14.718,82.525) -14.735,82.572 ; -14.736,82.572 -14.736,82.572 ; -14.735,82.572 cw(c-14.718,82.525) -14.733,82.573 ; -14.736,82.572 cw(c-14.718,82.525) -14.733,82.573 ; -14.736,82.572 -14.735,82.572 ; -14.733,82.573 -12.693,83.225 ; -12.693,83.225 cw(c-12.678,83.177) -12.691,83.226 ; -12.693,83.225 cw(c-12.678,83.177) -12.691,83.225 ; -12.691,83.225 cw(c-12.678,83.177) -12.691,83.226 ; -12.691,83.225 -12.691,83.226 ; -12.691,83.226 -12.691,83.226 ; -12.691,83.226 -10.622,83.78 ; -10.622,83.78 cw(c-10.609,83.732) -10.622,83.78 ; -10.622,83.78 -10.622,83.78 ; -10.622,83.78 cw(c-10.609,83.732) -10.62,83.78 ; -10.622,83.78 cw(c-10.609,83.732) -10.62,83.78 ; -10.622,83.78 -10.622,83.78 ; -10.62,83.78 -8.527,84.236 ; -8.527,84.236 cw(c-8.516,84.187) -8.525,84.236 -8.524,84.236 ; -8.527,84.236 cw(c-8.516,84.187) -8.524,84.236 ; -8.524,84.236 -6.413,84.591 ; -6.413,84.591 cw(c-6.404,84.542) -6.41,84.592 ; -6.412,84.591 cw(c-6.404,84.542) -6.41,84.592 ; -6.413,84.591 -6.412,84.591 ; -6.41,84.592 -4.283,84.846 ; -4.283,84.846 cw(c-4.278,84.796) -4.281,84.846 ; -4.283,84.846 cw(c-4.278,84.796) -4.281,84.846 ; -4.281,84.846 -2.145,84.999 ; -2.145,84.999 cw(c-2.141,84.949) -2.142,84.999 -2.142,84.999 ; -2.145,84.999 cw(c-2.141,84.949) -2.142,84.999 ; -2.142,84.999 -0.002,85.05 ; -0.002,85.05 cw(c0,85) 0.001,85.05 0.002,85.05 ; -0.001,85.05 cw(c0,85) 0.002,85.05 ; -0.002,85.05 -0.001,85.05 ; 0.002,85.05 2.142,84.999 ; 2.142,84.999 cw(c2.141,84.949) 2.145,84.999 ; 2.142,84.999 cw(c2.141,84.949) 2.145,84.999 ; 2.142,84.999 2.142,84.999 ; 2.145,84.999 4.281,84.846 ; 4.281,84.846 cw(c4.278,84.796) 4.283,84.846 ; 4.281,84.846 cw(c4.278,84.796) 4.283,84.846 ; 4.283,84.846 6.41,84.592 ; 6.41,84.592 cw(c6.404,84.542) 6.412,84.591 ; 6.41,84.592 cw(c6.404,84.542) 6.413,84.591 ; 6.412,84.591 6.413,84.591 ; 6.413,84.591 8.524,84.236 ; 8.524,84.236 cw(c8.516,84.187) 8.527,84.236 ; 8.524,84.236 8.525,84.236 cw(c8.516,84.187) 8.527,84.236 ; 8.527,84.236 cw(c8.516,84.187) 8.527,84.236 ; 8.527,84.236 8.527,84.236 ; 8.527,84.236 8.527,84.236 ; 8.527,84.236 10.62,83.78 ; 10.62,83.78 cw(c10.609,83.732) 10.622,83.78 ; 10.62,83.78 ccw(c10.609,83.732) 10.62,83.78 ; 10.62,83.78 cw(c10.609,83.732) 10.622,83.78 ; 10.62,83.78 10.62,83.78 ; 10.62,83.78 10.62,83.78 ; 10.622,83.78 ccw(c10.609,83.732) 10.622,83.78 ; 10.622,83.78 10.622,83.78 ; 10.622,83.78 10.622,83.78 ; 10.622,83.78 12.691,83.226 ; 12.691,83.225 cw(c12.678,83.177) 12.693,83.225 ; 12.691,83.225 ccw(c12.678,83.177) 12.691,83.226 ; 12.691,83.226 cw(c12.678,83.177) 12.693,83.225 ; 12.691,83.226 12.691,83.226 ; 12.691,83.226 12.691,83.225 ; 12.693,83.225 14.733,82.573 ; 14.733,82.573 cw(c14.718,82.525) 14.736,82.572 ; 14.733,82.573 cw(c14.718,82.525) 14.735,82.572 ; 14.736,82.572 ccw(c14.718,82.525) 14.735,82.572 ; 14.735,82.572 14.736,82.572 ; 14.736,82.572 14.736,82.572 ; 14.736,82.572 16.742,81.823 ; 16.742,81.823 cw(c16.725,81.777) 16.744,81.823 ; 16.742,81.823 ccw(c16.725,81.777) 16.742,81.823 ; 16.742,81.823 cw(c16.725,81.777) 16.744,81.823 ; 16.742,81.823 16.742,81.823 ; 16.742,81.823 16.742,81.823 ; 16.744,81.823 18.713,80.979 ; 18.713,80.979 cw(c18.694,80.933) 18.716,80.978 ; 18.713,80.979 cw(c18.694,80.933) 18.715,80.979 ; 18.716,80.978 ccw(c18.694,80.933) 18.715,80.979 ; 18.715,80.979 18.716,80.978 ; 18.716,80.978 18.716,80.978 ; 18.716,80.978 20.642,80.043 ; 20.642,80.042 cw(c20.62,79.998) 20.644,80.042 ; 20.642,80.042 ccw(c20.62,79.998) 20.642,80.043 ; 20.642,80.042 20.642,80.043 ; 20.642,80.043 cw(c20.62,79.998) 20.644,80.042 ; 20.642,80.043 20.642,80.043 ; 20.644,80.042 22.524,79.015 ; 22.524,79.015 cw(c22.5,78.971) 22.526,79.014 ; 22.524,79.015 cw(c22.5,78.971) 22.526,79.014 ; 22.526,79.014 24.355,77.899 ; 24.355,77.899 cw(c24.329,77.856) 24.357,77.898 ; 24.355,77.899 cw(c24.329,77.856) 24.357,77.898 ; 24.357,77.898 24.357,77.898 ; 24.357,77.898 26.13,76.698 ; 26.13,76.698 cw(c26.103,76.656) 26.133,76.696 ; 26.13,76.698 26.131,76.697 cw(c26.103,76.656) 26.133,76.696 ; 26.133,76.696 27.847,75.412 ; 27.847,75.412 cw(c27.817,75.372) 27.849,75.411 ; 27.847,75.412 cw(c27.817,75.372) 27.849,75.411 ; 27.849,75.411 29.501,74.047 ; 29.501,74.047 cw(c29.469,74.009) 29.502,74.046 ; 29.501,74.047 cw(c29.469,74.009) 29.502,74.046 ; 29.502,74.046 cw(c29.469,74.009) 29.503,74.046 ; 29.502,74.046 29.502,74.046 ; 29.503,74.046 29.502,74.046 ; 29.503,74.046 31.087,72.605 ; 31.087,72.605 cw(c31.054,72.568) 31.087,72.605 ; 31.087,72.605 31.087,72.605 ; 31.087,72.605 cw(c31.054,72.568) 31.089,72.603 ; 31.087,72.605 cw(c31.054,72.568) 31.089,72.603 ; 31.087,72.605 31.087,72.605 ; 31.089,72.603 32.603,71.089 ; 31.5,-0.05 ccw(c31.5,0) 31.55,0 ; 31.5,-0.05 ccw(c31.5,0) 31.55,0 ; 31.55,0 31.55,39.95 45,39.95 ; 32.603,71.089 cw(c32.568,71.054) 32.605,71.087 ; 32.603,71.089 cw(c32.568,71.054) 32.605,71.087 ; 32.605,71.087 ccw(c32.568,71.054) 32.605,71.087 ; 32.605,71.087 34.046,69.503 ; 32.605,71.087 32.605,71.087 ; 32.605,71.087 32.605,71.087 ; 34.046,69.502 cw(c34.009,69.469) 34.047,69.501 ; 34.046,69.502 ccw(c34.009,69.469) 34.046,69.503 ; 34.046,69.502 cw(c34.009,69.469) 34.047,69.501 ; 34.046,69.502 34.046,69.502 ; 34.046,69.503 34.046,69.502 ; 34.047,69.501 35.411,67.849 ; 35.411,67.849 cw(c35.372,67.817) 35.412,67.847 ; 35.411,67.849 cw(c35.372,67.817) 35.412,67.847 ; 35.412,67.847 36.696,66.133 ; 36.696,66.133 cw(c36.656,66.103) 36.697,66.131 ; 36.696,66.133 cw(c36.656,66.103) 36.698,66.13 ; 36.698,66.13 37.898,64.357 ; 36.697,66.131 36.698,66.13 ; 37.898,64.357 cw(c37.856,64.329) 37.899,64.355 ; 37.898,64.357 cw(c37.856,64.329) 37.899,64.355 ; 37.898,64.357 37.898,64.357 ; 37.899,64.355 39.014,62.526 ; 39.014,62.526 cw(c38.971,62.5) 39.015,62.524 ; 39.014,62.526 cw(c38.971,62.5) 39.015,62.524 ; 39.015,62.524 40.041,60.644 ; 40.041,60.644 cw(c39.998,60.62) 40.043,60.642 ; 40.041,60.644 cw(c39.998,60.62) 40.042,60.642 ; 40.043,60.642 ccw(c39.998,60.62) 40.042,60.642 ; 40.043,60.642 40.978,58.716 ; 40.043,60.642 40.043,60.642 ; 40.043,60.642 40.042,60.642 ; 40.979,58.715 cw(c40.933,58.694) 40.979,58.713 ; 40.979,58.715 ccw(c40.933,58.694) 40.978,58.716 ; 40.979,58.715 40.978,58.716 ; 40.978,58.716 cw(c40.933,58.694) 40.979,58.713 ; 40.978,58.716 40.978,58.716 ; 40.979,58.713 41.823,56.745 ; 41.823,56.742 ccw(c41.777,56.725) 41.823,56.745 ; 41.823,56.742 ccw(c41.777,56.725) 41.823,56.742 ; 41.823,56.742 ccw(c41.777,56.725) 41.823,56.745 ; 41.823,56.742 42.572,54.736 ; 41.823,56.742 41.823,56.742 ; 41.823,56.742 41.823,56.742 ; 42.573,54.733 ccw(c42.525,54.718) 42.572,54.735 ; 42.573,54.733 ccw(c42.525,54.718) 42.572,54.736 ; 42.573,54.733 43.225,52.693 ; 42.572,54.735 ccw(c42.525,54.718) 42.572,54.736 ; 42.572,54.736 42.572,54.735 ; 42.572,54.736 42.572,54.736 ; 43.226,52.691 ccw(c43.177,52.678) 43.225,52.693 ; 43.226,52.691 ccw(c43.177,52.678) 43.225,52.691 ; 43.225,52.691 ccw(c43.177,52.678) 43.225,52.693 ; 43.226,52.691 43.78,50.622 ; 43.226,52.691 43.226,52.691 ; 43.225,52.691 43.226,52.691 ; 43.78,50.62 ccw(c43.732,50.609) 43.78,50.622 ; 43.78,50.62 ccw(c43.732,50.609) 43.78,50.62 ; 43.78,50.62 ccw(c43.732,50.609) 43.78,50.622 ; 43.78,50.62 44.236,48.527 ; 43.78,50.62 43.78,50.62 ; 43.78,50.62 43.78,50.62 ; 43.78,50.622 ccw(c43.732,50.609) 43.78,50.622 ; 43.78,50.622 43.78,50.622 ; 43.78,50.622 43.78,50.622 ; 44.236,48.525 ccw(c44.187,48.516) 44.236,48.527 ; 44.236,48.524 ccw(c44.187,48.516) 44.236,48.527 ; 44.236,48.524 44.591,46.413 ; 44.236,48.525 44.236,48.524 ; 44.236,48.527 ccw(c44.187,48.516) 44.236,48.527 ; 44.236,48.527 44.236,48.527 ; 44.236,48.527 44.236,48.527 ; 44.592,46.41 ccw(c44.542,46.404) 44.591,46.413 ; 44.592,46.41 ccw(c44.542,46.404) 44.591,46.412 ; 44.592,46.41 44.846,44.283 ; 44.591,46.413 44.591,46.412 ; 44.846,44.281 ccw(c44.796,44.278) 44.846,44.283 ; 44.846,44.281 ccw(c44.796,44.278) 44.846,44.283 ; 44.846,44.281 44.999,42.145 ; 45,39.95 ccw(c45,40) 45.05,40 ; 45,39.95 ccw(c45,40) 45.05,40 ; 44.999,42.142 ccw(c44.949,42.141) 44.999,42.145 ; 44.999,42.142 ccw(c44.949,42.141) 44.999,42.145 ; 44.999,42.142 45.05,40.002 ; 44.999,42.142 44.999,42.142 ; 45.05,40 ccw(c45,40) 45.05,40.002 ; 45.05,40 ccw(c45,40) 45.05,40.001 ; 45.05,40.002 45.05,40.001

## Silkscreen, mask and mechanical layers (free items; w line width, h text height)
Mechanical 1:
  drawing of 350 lines, arcs and shapes, not listed